# EAGLE board gbg_v01 (EAGLE 9.1.3)
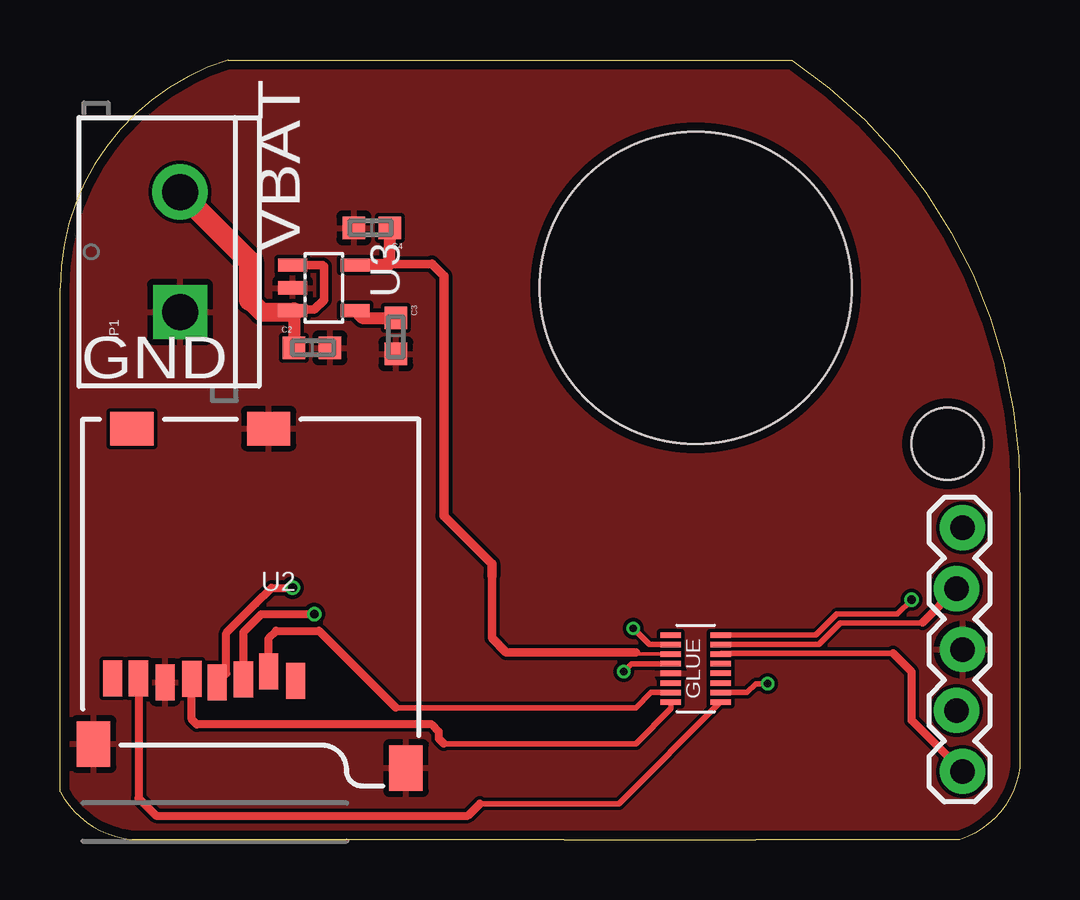
[diagram p0: board, top side]
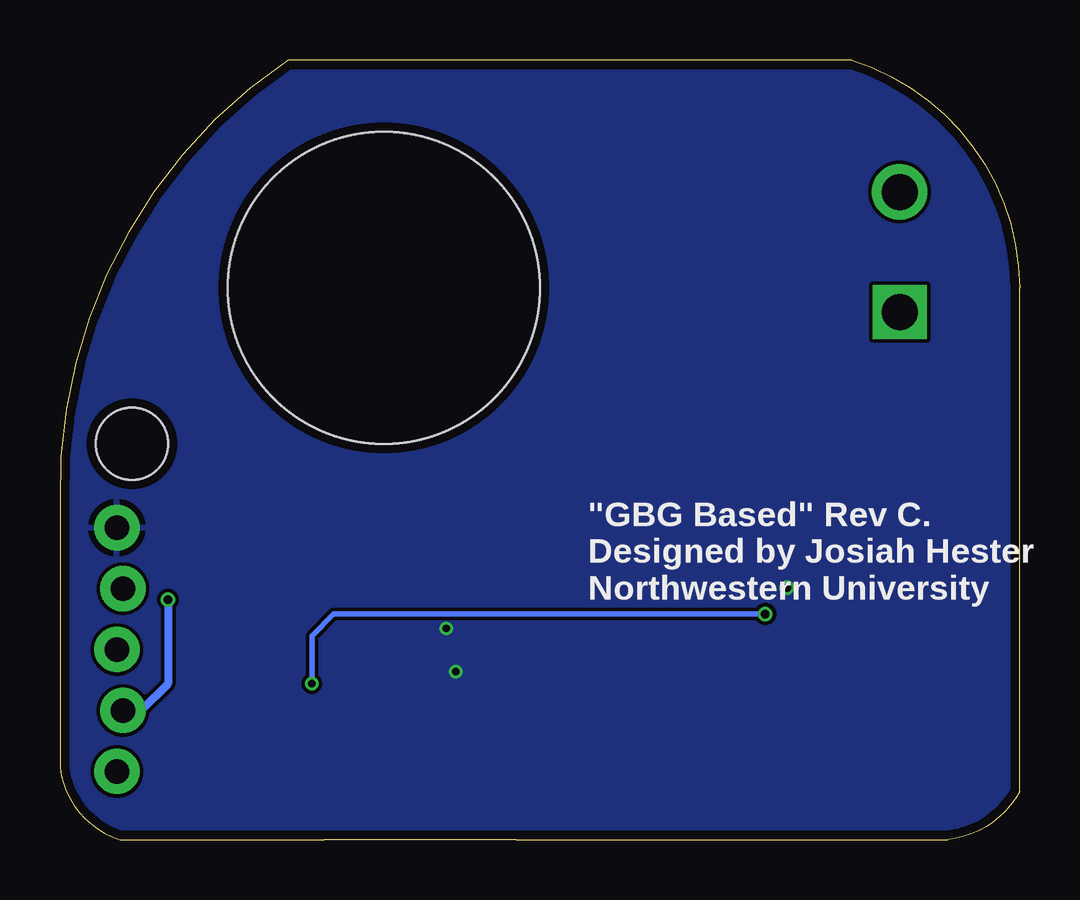
[diagram p1: board, bottom side, seen from below]

Size 40 x 32.5 mm. Coordinates in mm from the lower left corner, seen from the top.
Outline: 21,0 29,0 37.5,0 arc66 40,3 40,14 arc57 30.5,32.5 7,32.5 arc72 0,23 0,2 arc56 3,0 21,0
Copper layers (1*16): Top 0.035559375mm / dielectric 1.6mm / Bottom 0.035559375mm
Design rules "oshpark-2layer": minimum track width 6mil, minimum drill 10mil, track to track 6mil, track to pad 6mil, pad to pad 6mil, via to via 6mil, smd to smd 6mil, copper to edge 15mil, drill to drill 6mil, minimum pad ring 5mil, minimum via ring 5mil, stop-mask expansion 2.5mil, vias tented up to drill 0mil, thermal gap 10mil
Holes 3 mm at 37,16.5
Holes 13 mm at 26.5,23

## Footprints (pad centres in the part's own frame; a part is rotated, then mirrored left to right if it is on the bottom)
0603 = smd 0.95 x 0.95: 1 -0.75,0; 2 0.75,0
SCREWTERMINAL-5MM-2 = drill 1.5 pad 2.232 square: 1 0,0 | drill 1.5 pad 2.3: 2 5,0
1X05_LOCK = drill 1.016 pad 1.88: 1 0,0.127; 2 2.54,-0.127; 3 5.08,0.127; 4 7.62,-0.127; 5 10.16,0.127
BM10JC16 = smd 0.85 x 0.23: P1 1.04,1.53; P2 -1.04,1.53; P3 1.04,1.13; P4 -1.04,1.13; P5 1.04,0.73; P6 -1.04,0.73; P7 1.04,0.33; P8 -1.04,0.33; P9 1.04,-0.07; P10 -1.04,-0.07; P11 1.04,-0.47; P12 -1.04,-0.47; P13 1.04,-0.87; P14 -1.04,-0.87; P15 1.04,-1.27; P16 -1.04,-1.27
MICROSD_1:1 = smd 0.8 x 1.5: 1 5.096,10.919; 2 6.218,10.519; 3 7.274,10.853; 4 8.367,10.982; 5 9.421,10.828; 6 10.539,10.973; 7 11.648,10.819; 8 12.721,10.819 | smd 1.8 x 1.4: CD1 11.92,0.4; CD2 6.22,0.4 | smd 1.4 x 1.9: GND1 0.497,14.55; GND3 13.52,13.55
SOT25 = smd 0.55 x 1.2: 1 -0.95,-1.3; 2 0,-1.3; 3 0.95,-1.3; 4 0.95,1.3; 5 -0.95,1.3

## Placement (x,y rotation side)
C2  1uF  [0603]  10.5,20.5 0 top
C3  10nF  [0603]  14,21 270 top
C4  2.2uF  [0603]  13,25.5 180 top
JP1  [SCREWTERMINAL-5MM-2]  5,22 90 top
JP2  [1X05_LOCK]  37.5,13 270 top
ST1  SENSORTILEPLUG  [BM10JC16]  26.5,7 0 top
U2  USD-SOCKET  [MICROSD_1:1]  14.92,17.53 180 top
U3  LP2985AIM5-3.3  [SOT25]  11,23 270 top

## Library data of the parts
C2-C4 = tiny_passives
JP1 = SparkFun-Connectors; STOREFRONT_ID: PRT-08432
JP2 = SparkFun-Connectors
ST1 = sensortile
U2 = SparkFun-Connectors; DIGIKEY: WM3290CT-ND; PROD_ID: CONN-07820
U3 = LP2985; DIGIKEY: 296-32152-1-ND; MPN: LP2985-30DBVR

## Nets
!CS_SD: ST1.P14 U2.2
!SD_ENABLE: ST1.P12
BYPASS: C3.1 U3.4
GND: C2.2 C3.2 C4.2 JP1.1 JP2.3 ST1.P10 U2.6 U2.CD2 U2.GND1 U2.GND3 U3.2
I2C_SCL: ST1.P7
I2C_SDA: ST1.P9
RESET: JP2.5 ST1.P5
SD_MISO: ST1.P15 U2.7
SD_MOSI: ST1.P13 U2.3
SD_SCLK: ST1.P16 U2.5
SWDCLK: JP2.2 ST1.P3
SWDIO: JP2.4 ST1.P1
VBAT: C2.1 JP1.2 U3.1 U3.3
VCC: JP2.1 ST1.P4 ST1.P8 U2.4
VOUT: C4.1 ST1.P6 U3.5

## Tracks (layer width: path | path; a pad name or v marks a point on that pad's centre or on a via)
!CS_SD
  Top 0.22: ST1.P14 24.63,6.13 24,5.5 14,5.5
  Top 0.33: U2.2 8.7,8.4 9,8.7 10.8,8.7 14,5.5
BYPASS
  Top 0.5: U3.4 12.6,21.75 C3.1
GND
  pour Top: -7.5,-7.5 61.66,-7.5 61.66,32.56 -7.5,32.56
RESET
  Top 0.22: 34.73,7.77 28.09,7.77 28.07,7.75 27.56,7.75 ST1.P5
  Top 0.33: JP2.5 35.5,4.97 35.5,7 34.73,7.77
SD_MISO
  Top 0.22: ST1.P15 23.31,1.5 17.5,1.5
  Top 0.33: U2.7 3.27,1.73 4,1 17,1 17.5,1.5
SD_MOSI  (via drill 0.3, 0.35)
  Top 0.22: v29.5,6.5 29,6.5 28.63,6.13 ST1.P13
  Top 0.33: U2.3 7.65,8.65 8.4,9.4 v10.6,9.4
  Bottom 0.22: v10.6,9.4 28.6,9.4 29.5,8.5 v29.5,6.5
SD_SCLK
  Top 0.22: 16,4 24,4 25.46,5.46 ST1.P16
  Top 0.33: 16,4 15.8,4.2 15.8,4.5 15.5,4.8 5.7,4.8 5.5,5 U2.5
SWDCLK
  Top 0.22: 35.95,9.04 32.54,9.04 31.64,8.14 27.55,8.14 ST1.P3
  Top 0.33: JP2.2 35.95,9.04
SWDIO  (via drill 0.35)
  Top 0.22: ST1.P1 31.5,8.53 32.39,9.41 34.91,9.41 v35.5,10
  Bottom 0.33: JP2.4 36.62,5.38 35.5,6.5 v35.5,10
VBAT
  Top 0.35: U3.1 10.95,23.95 11,23.9 11,22.5 10.6,22.1 9.75,22.1 U3.3
  Top 0.5: U3.3 9.75,22 C2.1
  Top 0.8: 9.75,22 8.4,22 7.9,22.5
  Top 0.9: JP1.2 7.9,24.1 7.9,22.5
VCC  (via drill 0.3, 0.36)
  Top 0.22: ST1.P4 24.57,8.13 v23.9,8.8 | v23.5,7 23.83,7.33 24.54,7.33 24.55,7.33 25.07,7.33 25.08,7.33 ST1.P8
  Top 0.33: U2.4 6.93,6.92 6.93,8.61 8.16,9.84
  Top 0.34: 8.16,9.84 8.82,10.5 v9.7,10.5
  pour Bottom: -7.5,32.56 61.43,32.56 61.43,-7.5 -7.5,-7.5
VOUT
  Top 0.152: ST1.P6 24.07,7.73 24,7.8
  Top 0.35: 13.7,23.95 13.75,24 15.5,24 | 18,11 18,8.4 18.6,7.8 24,7.8
  Top 0.4: 15.5,24 16,23.5 16,13.5 18,11.5 18,11
  Top 0.5: C4.1 13.7,23.95 U3.5

## Text on the board
tPlace: VBAT | GND
bPlace: "GBG Based" Rev C. / Designed by Josiah Hester / Northwestern University